# Altium PCB Power Controller V1.0.PcbDoc
Units mil, origin at the board's own origin, x right, y up, seen from the top; angles counter-clockwise.
Board outline 4291.34 x 5120 mil, 2 copper layers (Top Layer, Bottom Layer); 36 components, 29 nets, 112 pads, 55 vias.
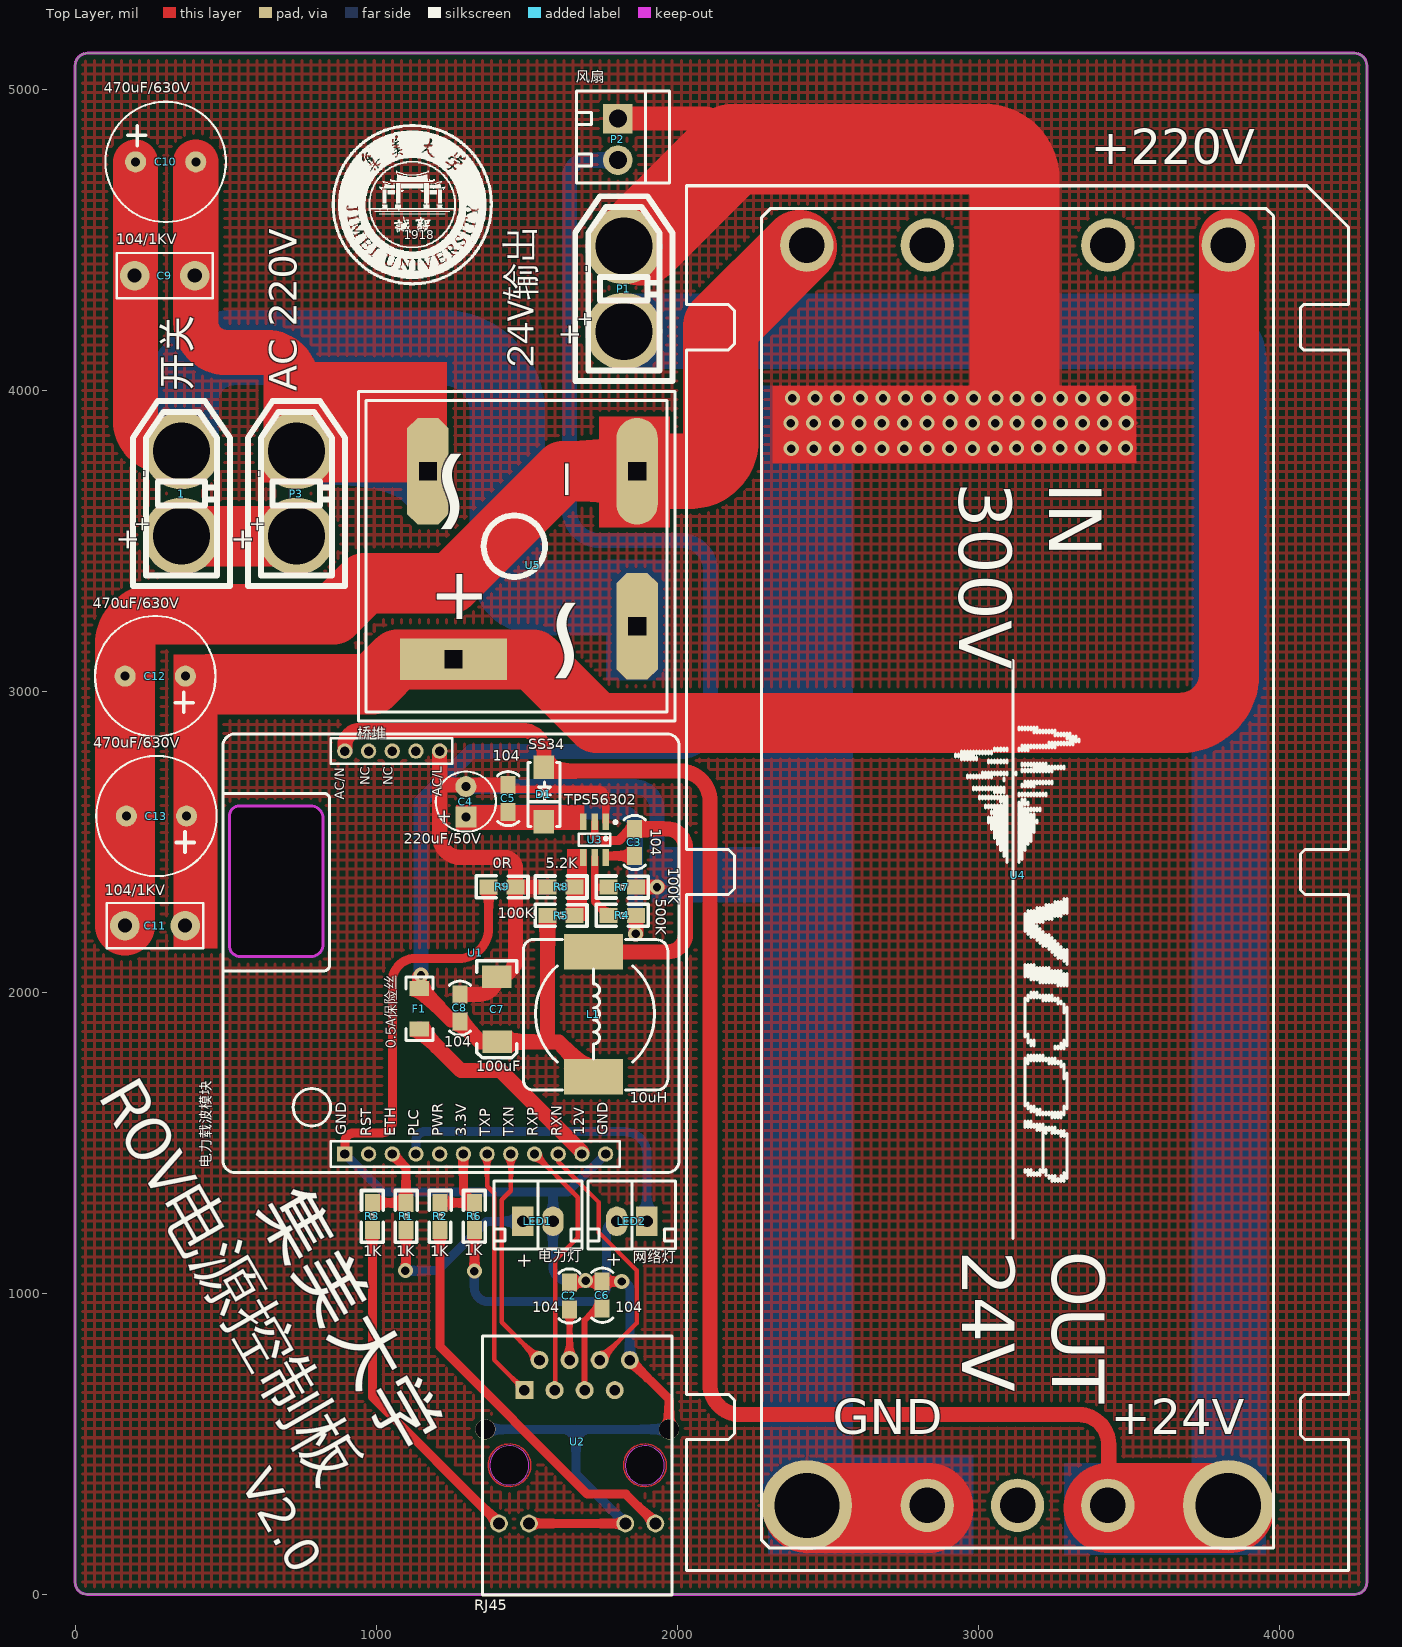
[diagram p0: Top Layer view]
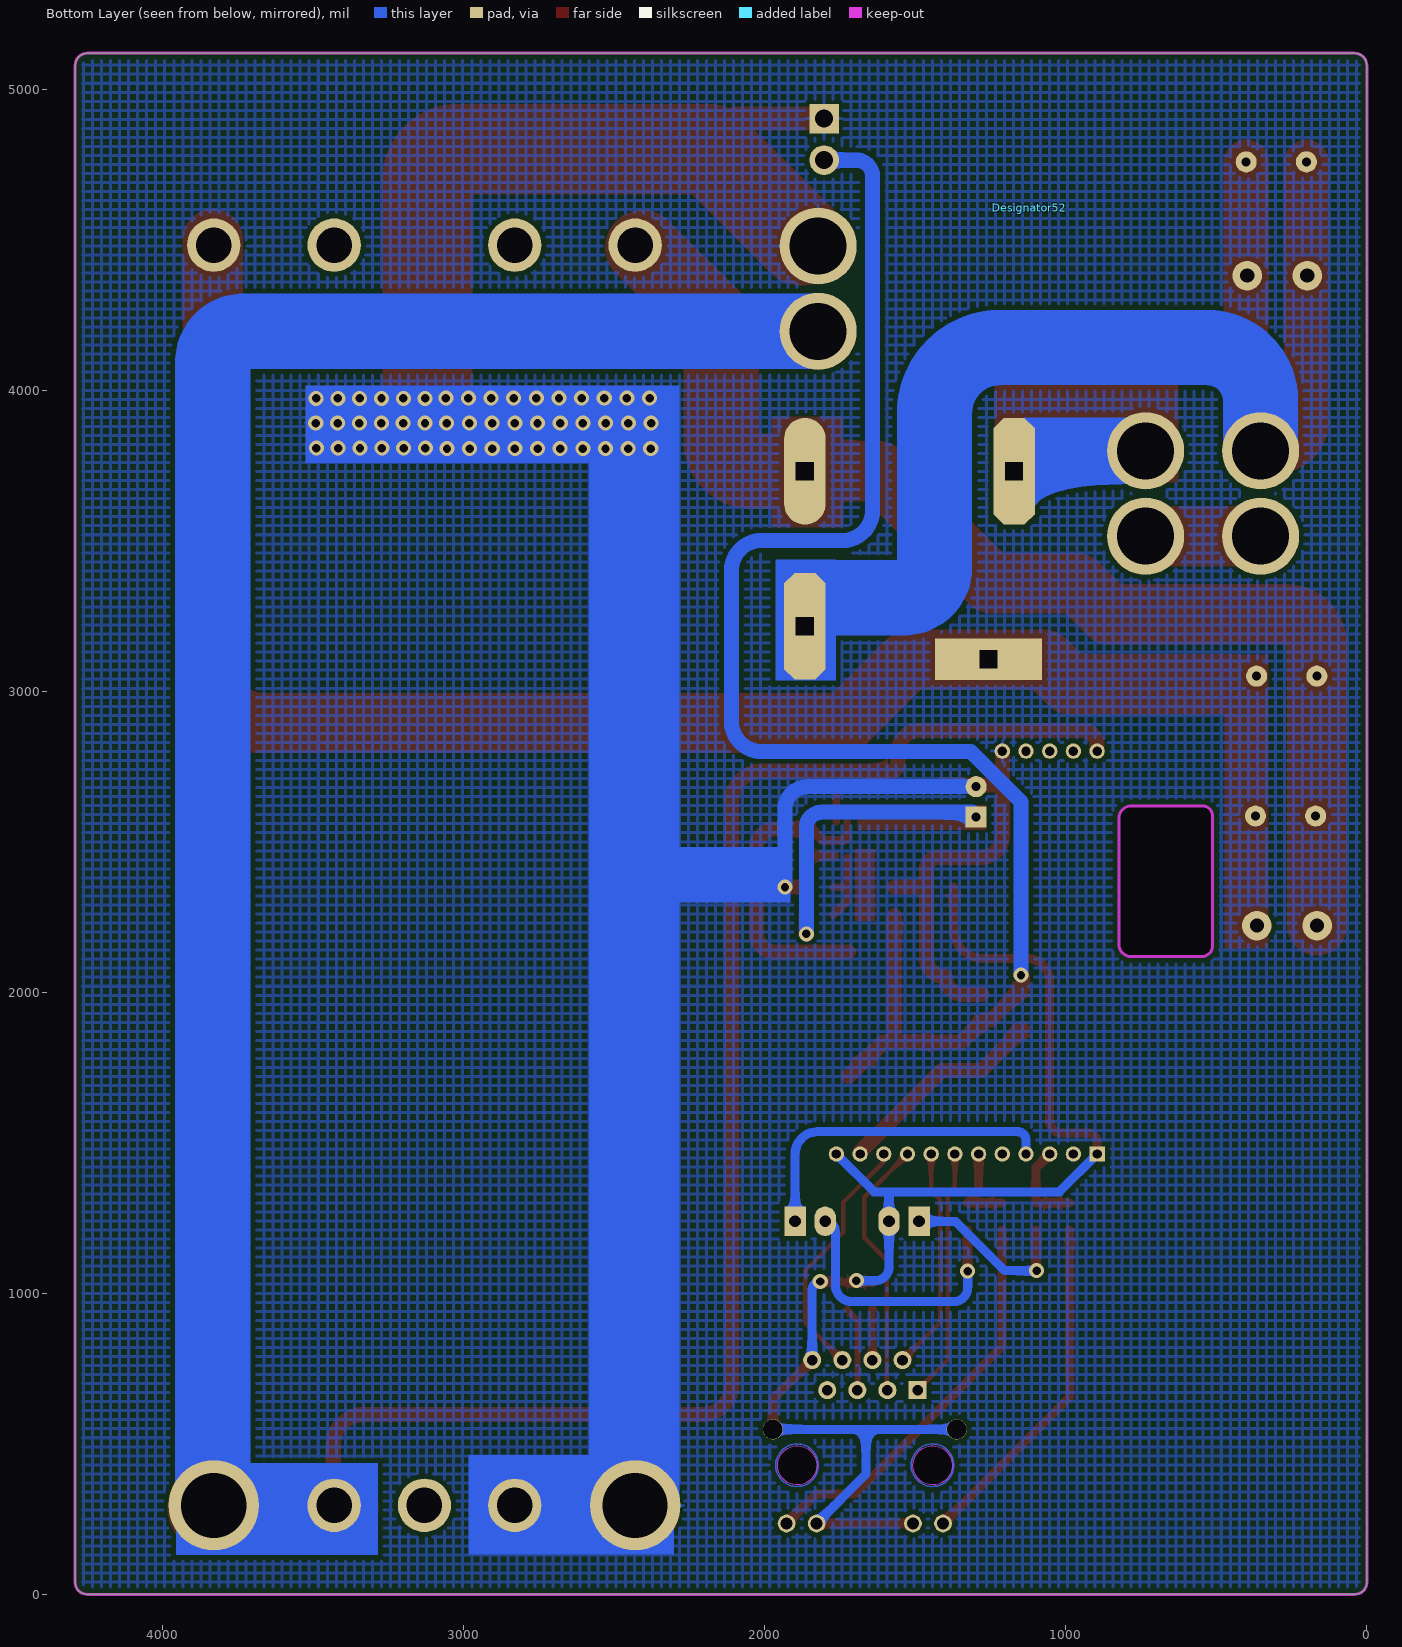
[diagram p1: Bottom Layer view, seen from below]

## Layer stack, top to bottom
Top Solder: solder mask 0.4, Solder Resist, Dk 3.5
Top Layer: signal copper 1.4
Dielectric 1: dielectric 12.6, FR-4, Dk 4.8
Bottom Layer: signal copper 1.4
Bottom Solder: solder mask 0.4, Solder Resist, Dk 3.5

## Board outline
0,39.37 ccw(c39.37,39.37) 39.37,0 4251.97,0 ccw(c4251.97,39.37) 4291.34,39.37 4291.34,5078.74 ccw(c4250.08,5078.74) 4250.08,5120 41.26,5120 ccw(c41.26,5078.74) 0,5078.74

## Design rules (kind name [scope] priority, off if disabled: settings)
Clearance [All] p1: gap=10
ComponentClearance [All] p1: gap=0 collisioncheckmode=3 verticalgap=0 showdistances=FALSE
DiffPairsRouting [All] p1: maxlimit=10 minlimit=10 mostfreqgap=10 toplayer_minwidth=15 toplayer_maxwidth=15 toplayer_prefwidth=15 bottomlayer_minwidth=15 bottomlayer_maxwidth=15 bottomlayer_prefwidth=15 maxuncoupledlength=500
PolygonConnect [All] p1: connectstyle=Relief reliefconductorwidth=10 reliefentries=4 polygonreliefangle="90 Angle" airgapwidth=10
RoutingVias [All] p1: holewidth=28 width=50 viastyle="Through Hole" minholewidth=28 minwidth=50 maxholewidth=28 maxwidth=50
SolderMaskExpansion [All] p1: expansion=4
Width [All] p1: maxlimit=500 minlimit=8 preferedwidth=10 minimp=50.000000 maximp=50.000000 favimp=50.000000
28 further rules are at their usual default settings.

## Classes and differential pairs
differential pair EPHY_RX: +EPHY_RX_P -EPHY_RX_N
differential pair EPHY_TX: +EPHY_TX_P -EPHY_TX_N

## Components (designator, comment, footprint, x,y, rotation, side; value= is the part's Value field where it differs from the comment)
1 "开关" XT60-F 353.07,3496 r90 top
C2 "104" 0805C 1641.73,1031.5 r270 top
C3 "104" 0805C 1858.07,2538 r270 top
C4 "220uF/50V" RB.1.2 1298,2583 r90 top
C5 "104" 0805C 1438.07,2684 r270 top
C6 "104" 0805C 1751,1034 r270 top
C7 "100uF" TAJ-C 1402.07,1835 r270 top
C8 "104" 0805C 1278.07,1988 r270 top
C9 "104/1KV" 无极性直插电容 397.64,4382.83 r180 top
C10 "470uF/630V" RB.2.4 200.79,4758.78 r0 top
C11 "104/1KV" 无极性直插电容 165.35,2219.41 r0 top
C12 "470uF/630V" RB.2.4 366.14,3050.12 r180 top
C13 "470uF/630V" RB.2.4 370.08,2585.55 r180 top
D1 "SS34" SMA/DO-214AC 1556.07,2741 r270 top
Designator52 "Comment" JMU_LOGO(1.35cm) 1122.05,4606.3 r0 bottom
F1 "0.5A保险丝" FUSE-1206 1145.67,2011.81 r270 top
L1 "10uH" CDRH124 1637.07,2037 r270 top
LED1 "电力灯" XH2/2.54mm/180#1 1582.79,1239.19 r180 top
LED2 "网络灯" XH2/2.54mm/180#2 1894.79,1239.19 r180 top
P1 "24V输出" XT60-F 1822.83,4176.52 r90 top
P2 "风扇" KF350-2P 1799.21,4901.57 r270 top
P3 "AC 220V" XT60-F 735.07,3496 r90 top
R1 "1K" 0805R 1100.41,1215.02 r90 top
R2 "1K" 0805R 1213.41,1215.02 r90 top
R3 "1K" 0805R 986,1296 r270 top
R4 "500K" 0805R 1777.09,2254.59 r0 top
R5 "100K" 0805R 1655.07,2256 r180 top
R6 "1K" 0805R 1325,1296 r270 top
R7 "100K" 0805R 1858.07,2350.41 r180 top
R8 "5.2K" 0805R 1574.09,2349 r0 top
R9 "0R" 0805R 1459.07,2351 r180 top
U1 "电力载波模块" 电力载波模块6410 491.07,1421 r90 top locked
U2 "RJ45" RJ45 1901.32,427.33 r180 top
U3 "TPS56302" SOT23-6 1764.07,2564 r270 top
U4 "Vicor" vicor 3151,2213 r0 top
U5 "桥堆" 整流全桥 1303.07,3272 r90 top

## Footprints (in the part's own frame and the unit in brackets; to place one, negate y for a bottom-side part, rotate by r counter-clockwise, add the part's x,y. Pads: shape width x height; smd on the part's side, far side on the other; paste and mask are expansions set on the pad)
0805C [mil]
  rect 60x50 smd: 1(-5,0) 2(85,0)
  silkscreen extent -50,-35 131,36, body extent -16,-26 102,29, height 37
0805R [mil]
  rect 60x50 smd: 1(-4.51,1.2) 2(85.49,1.2)
  silkscreen extent -46,-36 126,37, body extent -1,-23 78,26, height 18
CDRH124 [mm]
  rect 3x5 smd: 1(-2.469,2.159) 2(8.057,2.159)
  silkscreen extent -3.51,-3.76 9.19,8.43, body extent -3.11,-3.77 8.89,8.23, height 4.55
FUSE-1206 [mil]
  rect 50x65 smd: 1(-1,-2) 2(134,-2)
  silkscreen extent -39,-47 172,43, body extent 1,-36 127,28, height 34
JMU_LOGO(1.35cm) [mil]
KF350-2P [mm]
  rect 2.5x2.5 hole 1.5: 1(-0.023,0.102)
  round 2.5 hole 1.5: 2(3.477,0.102)
  silkscreen extent -2.36,-3.38 5.41,4.47, body extent -2.17,-3.2 5.23,4.3, height 10
RB.1.2 [mil]
  rect 70x70 hole 30: 1(0,0)
  round 70 hole 30: 2(100,0)
  silkscreen extent -50,-100 150,100, body extent -28,-73 130,85, height 278
RB.2.4 [mil]
  round 70 hole 30: 1(0,0) 2(200,0)
  silkscreen extent -100,-200 300,200, body extent -110,-218 316,207, height 512
RJ45 [mil]
  rect 60x60 hole 35: 1(408.65,-250.74)
  round 60 hole 35: 2(358.65,-350.74) 3(308.65,-250.74) 4(258.65,-350.74) 5(208.65,-250.74) 6(158.65,-350.74) 7(108.65,-250.74) 8(58.65,-350.74)
  round 59.06 hole 40.16: 9(493.29,192.17) 12(-26.39,192.17)
  round 59.05 hole 40.16: 10(393.45,192.17) 11(73.45,192.17)
  round 66.93 hole 64.96: 13(538.57,-120.74) 14(-71.67,-120.74)
  round 116.14 hole 127.95: MH3(8.42,-1.24) MH3(458.42,-1.24)
  Keep-Out Layer circle w2: c8.49,-0.74 r64.96
  Keep-Out Layer circle w2: c458.49,-0.74 r64.96
  Multi-Layer circle w5: c458.42,-1.24 r70.8
  Multi-Layer circle w5: c8.42,-1.24 r70.8
  silkscreen extent -82,-431 548,429, body extent -82,-417 543,425, height 551
SMA/DO-214AC [mm]
  rect 2x1.75 smd: 1(-0.178,0.025) 2(4.422,0.025)
  silkscreen extent -0.58,-1.32 4.82,1.38, body extent -0.38,-1.32 4.73,1.35, height 2.12
SOT23-6 [mm]
  rect 1.4x0.55 smd: 1(-0.051,-0.025) 2(-0.051,-0.975) 3(-0.051,-1.925) 4(2.949,-1.925) 5(2.949,-0.975) 6(2.949,-0.025)
  silkscreen extent -0.15,-2.31 1.96,0.91, body extent 0.07,-2.47 2.88,0.53, height 1.15
TAJ-C [mm]
  rect 1.905x2.5 smd: 1(0,0) 2(-5.505,-0.025)
  silkscreen extent -6.86,-1.73 1.35,1.65, body extent -5.77,-1.68 0.22,1.52, height 2.6
vicor [mm] "V300A24T500"
  round 4.5 hole 3: 1(17.269,57.638) 2(7.109,57.638) 3(-8.131,57.638) 4(-18.291,57.638) 6(-8.131,-48.707) 7(-0.511,-48.707) 8(7.109,-48.707)
  round 7.62 hole 5.5: 5(-18.291,-48.707) 9(17.269,-48.707)
  silkscreen extent -28.45,-54.19 27.43,62.65, body extent -28.49,-54.13 27.39,62.71, height 15
XH2/2.54mm/180#1 [mm]
  oval 1.8x2.5 hole 1: 1(-0.12,0)
  rect 1.8x2.5 hole 1: 2(2.42,0)
  silkscreen extent -2.55,-3.4 4.85,2.35, body extent -2.55,-3.4 4.85,2.35, height 7
XH2/2.54mm/180#2 [mm]
  rect 1.8x2.5 hole 1: 1(-0.12,0)
  oval 1.8x2.5 hole 1: 2(2.42,0)
  silkscreen extent -2.55,-3.4 4.85,2.35, body extent -2.55,-3.4 4.85,2.35, height 7
XT60-F [mm]
  round 6.5 hole 4.8: 1(0.489,0) 2(7.689,0)
  silkscreen extent -3.71,-4.1 11.89,4.1, body extent -3.81,-4.06 12.09,4.09, height 16.5
整流全桥 [mm]
  oct 9x3.5 hole 1.5 square: AC1(-1.422,-14.326) AC2(11.659,3.327)
  rect 3.5x9 hole 1.5 square: DC+(-4.216,1.168)
  oval 9x3.5 hole 1.5 square: DC-(11.659,-14.326)
  silkscreen extent -9.42,-17.5 18.39,9.17
无极性直插电容 [mm]
  round 2.5 hole 1.2: 1(0,0.051) 2(5.08,0.051)
  silkscreen extent -1.52,-1.85 6.6,1.96, body extent -0.96,-0.8 6.04,0.9, height 7.06
电力载波模块6410 [mm]
  round 1.3 hole 0.8: 0(35.059,-16.289) 2(1.059,-12.289) 3(1.059,-14.289) 4(1.059,-16.289) 5(1.059,-18.289) 6(1.059,-20.289) 7(1.059,-22.289) 8(1.059,-24.289) 9(1.059,-26.289) 10(1.059,-28.289) 11(1.059,-30.289) 12(1.059,-32.289) 13(35.059,-18.289) 14(35.059,-14.289) 15(35.059,-12.289) 16(35.059,-10.289)
  rect 1.3x1.3 hole 0.8: 1(1.059,-10.289)
  Keep-Out Layer board cut-out: 17.729,-7.417 17.729,-1.46 17.8,-1.106 18.001,-0.805 18.301,-0.604 18.656,-0.533 18.656,-0.533 29.567,-0.533 29.567,-0.533 29.998,-0.649 30.314,-0.965 30.429,-1.396 30.429,-1.396 30.429,-7.404 30.349,-7.808 30.121,-8.15 29.779,-8.378 29.375,-8.458 29.375,-8.458 18.771,-8.458 18.372,-8.379 18.034,-8.153 17.808,-7.815 17.729,-7.417
  Keep-Out Layer lines w0.254: 18.656,-0.533 ccw(c18.656,-1.46) 17.729,-1.46 17.729,-7.417 ccw(c18.771,-7.417) 18.771,-8.458 29.375,-8.458 ccw(c29.375,-7.404) 30.429,-7.404 30.429,-1.396 ccw(c29.567,-1.396) 29.567,-0.533 18.656,-0.533
  silkscreen extent -0.5,-38.5 36.5,0, body extent -0.15,-33.42 36.3,-8.87, height 4.35

## Part data
C2 C3 C5 C6 C8: library part Cap1, "无极贴片电容"
C4 C10 C12 C13: library part Cap3, "直插极性电容"
C7: library part "Pol Cap", "极性贴片电容"
C9 C11: library part Cap2, "无极直插电容"
D1: library part Diode, "二极管"
F1: library part Fuse, "保险丝"
L1: library part L, "电感"
LED1 LED2 P1 P2 P3: library part 接线端子-2PIN, "2PIN"
R1 R2 R3 R4 R5 R6 R7 R8 R9: library part Res, "电阻"
U1: library part 电力载波模块6410
U3: library part TPS54302
U4: library part 滨达模块（220V--24V）

## Via types
v1: diameter 50, hole 28, Top Layer to Bottom Layer, 55 vias

## Nets (pads, with @x,y where several pads share a name; then routed paths per layer and width w, separated by ;. In a path a pad name is that pad's centre, name@x,y a point inside that pad or via, vN(x,y) a via of type N, cw(c..) or ccw(c..) an arc to the next point about the centre after c; other vN are vias at no path point)
12.0V: C7.1 C8.2 F1.1 L1.2 P2.2 R5.2 | length 5212
  Top Layer w50: v1(1149,2057) 1143.67,2051.67 F1.1 1248.03,1908.45 C8.2@1272.62,1908.45 ; C8.2 1346.07,1835 C7.1 1562.99,1835 ; R5.2 1569.58,1841.59 cw(c1562.99,1841.59) 1562.99,1835 ; L1.2 1606.85,1835 1562.99,1835
  Bottom Layer w50: v1(1149,2057) 1149,2632.99 1316.01,2800 2011,2800 ccw(c2011,2900) 2111,2900 2111,3401 ccw(c2011,3401) 2011,3501 1742,3501 cw(c1742,3601) 1642,3601 1642,4710.31 cw(c1696.37,4710.31) 1696.37,4764.69 P2.2
24.0V: D1.1 P1.1 U1.16 U4.8 U4.9 | length 11199.3
  Top Layer w50: U1.16 896.14,2820.76 cw(c945.46,2820.76) 945.46,2870.08 1486.83,2870.08 cw(c1486.83,2799.84) 1557.07,2799.84 D1.1 1570.07,2735 2009,2735 cw(c2009,2635) 2109,2635 2109,697 ccw(c2209,697) 2209,597 3333.86,597 cw(c3333.86,497) 3433.86,497 U4.8@3433.86,326.77
  Top Layer w300: U4.8@3433.86,286.77 U4.9@3833.86,286.77
  Bottom Layer w250: P1.1 3733.86,4195.79 cw(c3733.86,4095.79) 3833.86,4095.79 U4.9@3833.86,326.77
DGND: C2.1 C6.1 LED1.1 R9.2 U1.1 U1.12 U2.8 U2.10 U2.11 U2.13 U2.14 | length 4637
  Top Layer w30: U1.1 896.14,1503.14 cw(c925,1503.14) 925,1532 1014,1532 ccw(c1014,1572) 1054,1572 1054,2037 cw(c1129,2037) 1129,2112 1273.58,2112 ccw(c1273.58,2212) 1373.58,2212 R9.2 ; U2.10 U2.11 ; C2.1 C6.1@1728.35,1036.5 ; C6.1 v1(1816,1039) ; U2.8 1972.99,647.76 U2.14
  Bottom Layer w30: U1.1 1021.83,1337 1587,1337 ; U2.13 1664,548.07 ; v1(1696,1042) 1633.23,1042 cw(c1633.23,1087.72) 1587.51,1087.72 LED1.1 1587.51,1336.49 1587,1337 ; U1.12 1636.6,1337 1587,1337 ; v1(1816,1039) cw(c1816,1012.32) 1842.68,1012.32 U2.8 ; U2.11 1664,399.03 1664,548.07 ; U2.14 1664,548.07
EPHY_RX_N: U1.10 U2.6 | length 817.4
  Top Layer w15: 1604.8,1437.01 1740.16,1301.65 1740.16,1201.84 1865,1077 1865,900.39 U2.6
EPHY_RX_P: U1.9 U2.3 | length 875.7
  Top Layer w15: U1.9 1669.29,1319.46 1669.29,1185.04 1594.49,1110.24 1594.49,679.88 U2.3
EPHY_TX_N: U1.8 U2.2 | length 749
  Top Layer w15: U1.8 1447.32,1341.02 1417.32,1311.02 1417.32,903.42 U2.2
EPHY_TX_P: U1.7 U2.1 | length 836
  Top Layer w15: U1.7 1368.58,1355.83 1392.32,1332.09 1392.32,778.42 U2.1
GND: C4.2 C5.1 C7.2 C8.1 P1.2 P2.1 R7.1 R8.1 R9.1 U1.13 U3.1 U4.5 U4.6 | length 9471
  Top Layer w25: 1411,2689 ccw(c1426,2689) 1426,2674 1737.07,2674 cw(c1737.07,2648) 1763.07,2648 U3.1
  Top Layer w50: U1.13 1211.1,2685 ; C8.1 1342.34,1993 ccw(c1342.34,2051.73) C7.2 ccw(c1401.07,2114.24) 1463.58,2114.24 R9.1 ccw(c1365.38,2349.8) R9.1@1463.58,2350.2 ; 1411,2689 1215.1,2689 ccw(c1215.1,2685) 1211.1,2685 ; R8.1 R9.1@1463.58,2350.2 ; R7.1 v1(1933.07,2349.2) v1@1935.82,2349.2 ; 1211.1,2685 1211.1,2516.9 ccw(c1280,2516.9) 1280,2448 1426.25,2448 cw(c1426.25,2410.92) 1463.33,2411.07 R9.1@1463.58,2350.2
  Top Layer w80: P2.1 2082,4902.48 cw(c2082,4802.48) 2182,4802.48 2182,4801
  Top Layer w300: P1.2@1878.5,4497.5 2182,4801 3021,4801 cw(c3021,4701) 3121,4701 v1@3121,3911 ; U4.5@2433.86,286.77 U4.6@2833.86,286.77
  Bottom Layer w50: C4.2 1857.87,2683 cw(c1857.87,2607.8) 1933.07,2607.8 v1(1933.07,2349.2)
  Bottom Layer w300: U4.5@2433.86,326.77 2433.86,3821.14
  other v1: 2379,3806 2454.22,3806 2529.44,3806 2604.67,3806 2679.89,3806 2755.11,3806 2830.33,3806 2905.56,3806 2980.78,3806 3056,3806 3127.56,3808 3200.04,3808 3272.53,3808 3345.02,3808 3417.51,3808 3490,3808 2378,3891 2453.44,3891 2528.89,3891 2604.33,3891 2679.78,3891 2755.22,3891 2830.67,3891 2906.11,3891 2981.56,3891 3057,3891 3129.11,3891 3201.69,3891 3274.27,3891 3346.84,3891 3419.42,3891 3492,3891 3128.56,3973 3201.04,3973 3273.53,3973 3346.02,3973 3418.51,3973 3491,3973 2383,3974 2458.22,3974 2533.44,3974 2608.67,3974 2683.89,3974 2759.11,3974 2834.33,3974 2909.56,3974 2984.78,3974 3060,3974
Net1_1: 1.1 P3.1 | length 382
  Top Layer w200: 1.1 P3.1
Net1_2: 1.2 C9.2 C10.1 U5.AC1 | length 3462.3
  Top Layer w150: C10.1 200.79,3898.73 ccw(c300.79,3898.73) 300.79,3798.73 1.2
  Bottom Layer w250: 1.2 353.07,3965.63 cw(c529.18,3965.63) 529.18,4141.73 1219.9,4141.73 cw(c1219.9,3925.66) 1435.97,3925.66 1435.97,3411.02 ccw(c1535.97,3411.02) 1535.97,3311.02 1783.46,3311.02
NetC2_2: C2.2 U2.4 | length 168.4
  Top Layer w20: U2.4 C2.2@1642.68,945.55
  Top Layer w30: C2.2@1641.73,945.55 C2.2
NetC3_1: C3.1 L1.1 U3.2 | length 1034.6
  Top Layer w25: 1725.67,2522.36 U3.2
  Top Layer w30: 1725.67,2522.36 ccw(c1744.09,2522.36) 1744.09,2503.94 1807.09,2503.94 1846.15,2543 C3.1
  Top Layer w50: L1.1 1969.23,2134.22 ccw(c1969.23,2192.55) 2027.56,2192.55 2027.56,2480.32 ccw(c1964.87,2480.32) 1964.87,2543 C3.1
NetC3_2: C3.2 U3.6 | length 89.9
  Top Layer w30: U3.6@1768.18,2453 C3.2
NetC4_1: C4.1 C5.2 D1.2 R4.2 U3.3 | length 1017.2
  Top Layer w50: v1(1862.2,2194.22) 1862.58,2194.22 R4.2
  Bottom Layer w50: C4.1 cw(c1313.43,2583) 1313.43,2598.43 1811.02,2598.43 cw(c1811.02,2547.24) 1862.2,2547.24 v1(1862.2,2194.22)
NetC6_2: C6.2 U2.5 | length 283.2
  Top Layer w20: U2.5 1692.68,910.83 C6.2@1728.35,946.5
NetC9_1: C9.1 C10.2 P3.2 U5.AC2 | length 1577.8
  Top Layer w150: C10.2 400.79,4225.98 ccw(c500.79,4225.98) 500.79,4125.98 635.07,4125.98 cw(c635.07,4025.98) 735.07,4025.98 P3.2
  Bottom Layer w220: P3.2 U5.AC2@1104.34,3798.73
NetC11_1: C11.1 C12.2 C13.2 U4.4 U5.DC- | length 3976.1
  Top Layer w200: C11.1 C12.2@165.35,3050.12 ; C12.2 166.14,3155.91 cw(c266.14,3155.91) 266.14,3255.91 858.27,3255.91 961.36,3359 1248.76,3359 1620.76,3731 U5.DC-
  Top Layer w250: U5.DC- 2045,3731 ccw(c2045,3831) 2145,3831 2145,4212.91 U4.4@2406.54,4474.46
NetC11_2: C11.2 C12.1 C13.1 U4.1 U5.DC+ | length 5047.9
  Top Layer w200: 444.88,3023.62 988.19,3023.62 1070.57,3106 U5.DC+ 1521,3106 1732,2895 3672.35,2895 ccw(c3672.35,3056.51) 3833.86,3056.51 U4.1@3833.86,4501.77
NetLED1_2: LED1.2 R1.1 | length 601.2
  Top Layer w30: v1@1099.2,1067.8 R1.1
  Bottom Layer w30: v1(1097,1075) 1203,1075 1367.19,1239.19 LED1.2
NetLED2_1: LED2.1 U1.4 | length 1094.7
  Bottom Layer w30: U1.4 1132.36,1508.36 cw(c1161,1508.36) 1161,1537 1824.32,1537 cw(c1824.32,1461.81) 1899.51,1461.81 LED2.1
NetLED2_2: LED2.2 R6.2 | length 921.1
  Top Layer w30: v1(1326.2,1073.8) R6.2
  Bottom Layer w30: v1(1326.2,1073.8) 1326.2,1017.68 ccw(c1371.89,1017.68) 1371.89,972 1710.22,972 ccw(c1710.22,1027.78) 1766,1027.78 1766,1205.68 cw(c1799.51,1205.68) LED2.2
NetR2_1: R2.1 U2.12 | length 1346.6
  Top Layer w30: R2.1 1212.2,822.8 1702,333 1829.87,333 U2.12
NetR3_2: R3.2 U2.9 | length 1149.7
  Top Layer w30: R3.2 987.2,655.98 U2.9
NetR4_1: R4.1 R7.2 U3.5 | length 260.6
  Top Layer w25: U3.5 1725.67,2354.33 ; R4.1 1725.67,2302.71 1725.67,2354.33 ; R7.2 1730.8,2349.2 1725.67,2354.33
NetR5_1: R5.1 R8.2 U3.4 | length 199.3
  Top Layer w30: R5.1 1657.7,2256.68 1657.7,2417.32 U3.4@1683.18,2442.8
PLC_3.3V: R2.2 R6.1 U1.6 | length 291.2
  Top Layer w30: R2.2 R6.1 1289.84,1336.87 U1.6
PLC_12V: F1.2 U1.11 | length 708.9
  Top Layer w50: F1.2 1281.32,1740.16 1413.02,1740.16 U1.11@1683.54,1469.63
PLC_ETH: R1.2 R3.1 U1.3 | length 293.1
  Top Layer w30: R3.1 R1.2 1099.2,1417.1 U1.3
PLC_PWR: U1.5
pads on no net: U1.0 U1.2 U1.14 U1.15 U2.7 U2.MH3 U4.2 U4.3 U4.7

## Polygon pours and split planes (outlines as drawn)
GND on Top Layer "Top Layer-No Net" (hatched 90Degree grid 30 track 10, remove dead copper, pour order 6): -257,4354 -257,5222 cw(c-157,5222) -157,5322 425,5322 4389,5322 cw(c4389,5222) 4489,5222 4489,4026 4489,-140 cw(c4389,-140) 4389,-240 3782,-240 -174,-240 cw(c-174,-140) -274,-140 -274,383
GND on Bottom Layer "Top Layer-No Net" (hatched 90Degree grid 30 track 10, remove dead copper, pour order 8): -333,4296 -333,5306 cw(c-233,5306) -233,5406 71,5406 4448,5406 cw(c4448,5306) 4548,5306 4548,3925 4548,-131 cw(c4448,-131) 4448,-231 3631,-231 -233,-231 cw(c-233,-131) -333,-131 -333,223

## Keep-outs
Keep-Out Layer:
  the board outline again, w10

## Other copper
Top Layer:
  rectangle net GND: 2317,3758 3526,4016
  rectangle net NetC11_1: 1740.16,3543.31 1976.38,3913.39
  rectangle net NetC11_2: 326.77,2145.67 472.44,3122.05
  rectangle net NetC9_1: 625.98,3692.91 1236.22,4094.49
  rectangle net NetR5_1: 1633.86,2236.22 1700.79,2476.38
  rectangle net NetC4_1: 1266,2539.37 1692.91,2622.05
Bottom Layer:
  rectangle net GND: 1915,2299 2332,2483
  rectangle net 24.0V: 3286,130 3957,436
  rectangle net GND: 2302,132 2984,462
  rectangle net GND: 2283,3758 3526,4016
  rectangle net Net1_2: 1763.78,3035.43 1964.57,3437.01

## Silkscreen, mask and mechanical layers (free items; w line width, h text height)
Top Overlay:
  text "+220V" at 3374,4712 h200
  text "ROV电源控制板" at 29.15,1627.7 h275.59 r300
  text "集美大学" at 551.18,1259.84 h300 r300
  text "+" at 1752,1138 h80 r270
  text "+" at 1455,1134 h80 r270
  text "V2.0" at 511.81,354.33 h200 r300

## Text inside footprints (layer, text, board x,y; h text height)
1: Top Overlay "-" at 195.07,3735 h80 r270; Top Overlay "+" at 187.07,3582 h80 r270; Top Overlay "+" at 121.07,3543 h118.11 r270
C4: Top Overlay "+" at 1262,2609 h78.74 r90
Designator52: Top Overlay "1918" at 1092.15,4492.48 h50
P1: Top Overlay "-" at 1664.83,4415.52 h80 r270; Top Overlay "+" at 1656.83,4262.52 h80 r270; Top Overlay "+" at 1590.83,4223.52 h118.11 r270
P3: Top Overlay "-" at 577.07,3735 h80 r270; Top Overlay "+" at 569.07,3582 h80 r270; Top Overlay "+" at 503.07,3543 h118.11 r270
U1: Top Overlay "NC" at 1067.07,2688 h55 r90; Top Overlay "NC" at 990.07,2687 h55 r90; Top Overlay "AC/L" at 1229.07,2651 h55 r90; Top Overlay "AC/N" at 906.07,2640 h55 r90; Top Overlay "GND" at 1781.07,1525 h60 r90; Top Overlay "12V" at 1702.63,1524.94 h60 r90; Top Overlay "RXN" at 1627.56,1521.01 h60 r90; Top Overlay "RXP" at 1548.56,1521.01 h60 r90; Top Overlay "TXN" at 1469.56,1521.06 h60 r90; Top Overlay "TXP" at 1390.56,1521.06 h60 r90; Top Overlay "3.3V" at 1311.01,1521.01 h60 r90; Top Overlay "PWR" at 1232.56,1521.01 h60 r90; Top Overlay "PLC" at 1153.01,1521.01 h60 r90; Top Overlay "ETH" at 1074.56,1521.01 h60 r90; Top Overlay "RST" at 995.01,1521.01 h60 r90; Top Overlay "GND" at 912.07,1525 h60 r90
U4: Top Overlay "GND" at 2516.28,493.55 h200; Top Overlay "+24V" at 3441.28,493.55 h200; Top Overlay "IN / 300V" at 2878.28,3694.55 h300 r270; Top Overlay "OUT / 24V" at 2888.28,1140.55 h300 r270
U5: Top Overlay "~" at 1472.07,3831 h500 r90; Top Overlay "~" at 1852.07,3336 h500 r90; Top Overlay "-" at 1827.07,3776 h500 r90; Top Overlay "+" at 1377.07,3181 h300